# Altium PCB LM2596_DC-DC_PCB.PcbDoc
Units mm, origin at the board's own origin, x right, y up, seen from the top; angles counter-clockwise.
Board outline 42.5 x 28.75 mm, 2 copper layers (Top Layer, Bottom Layer); 7 components, 5 nets, 22 pads, 0 vias.
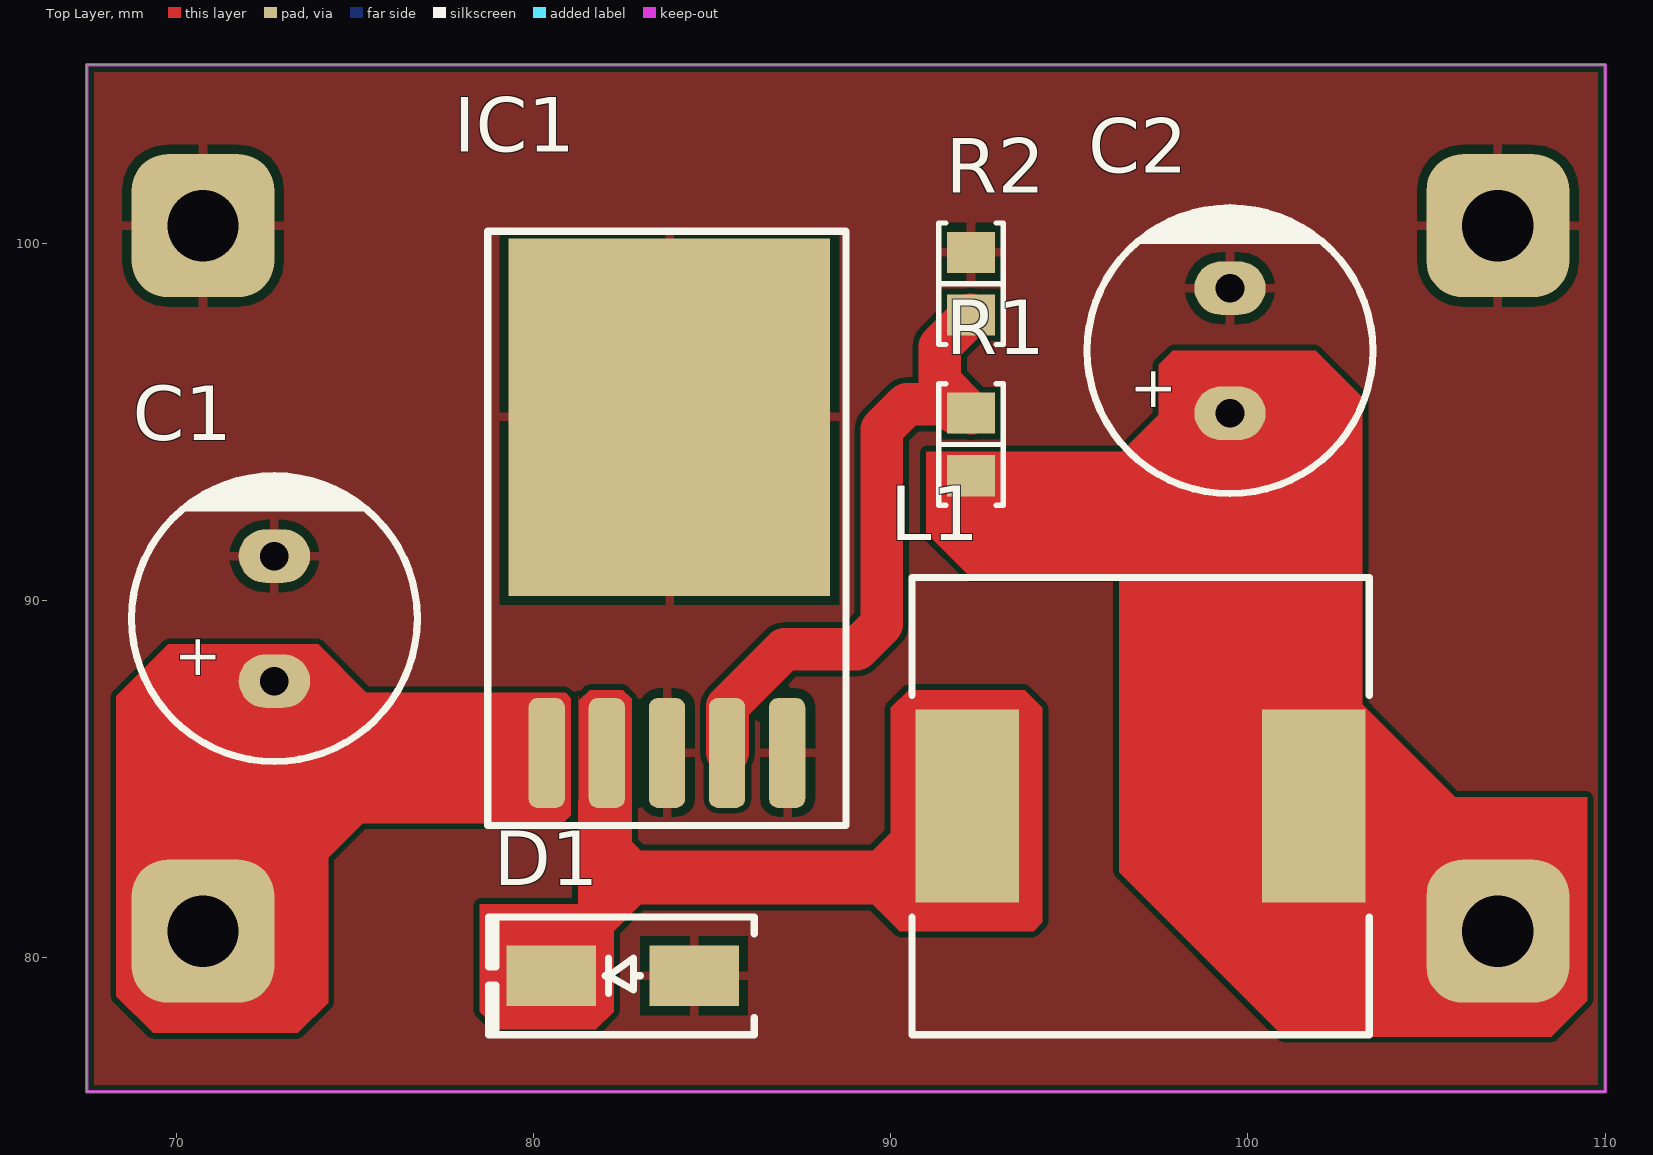
[diagram p0: Top Layer view]
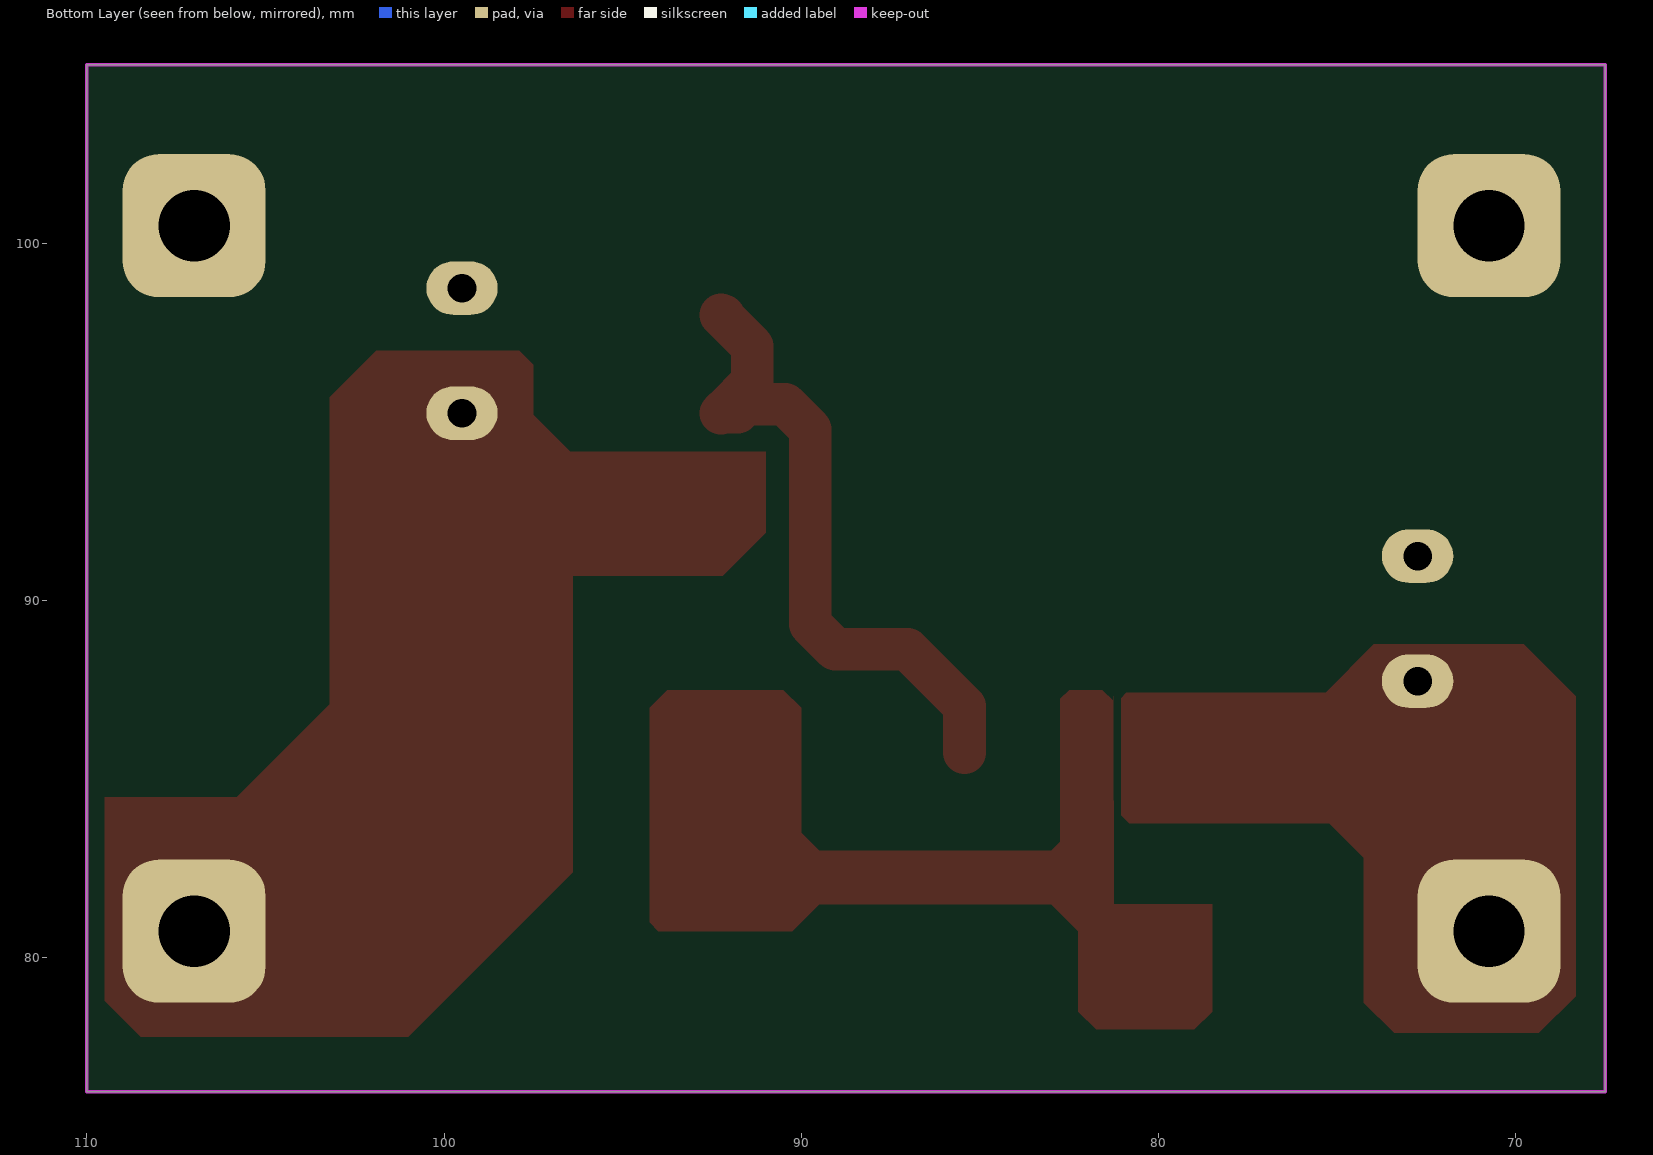
[diagram p1: Bottom Layer view, seen from below]
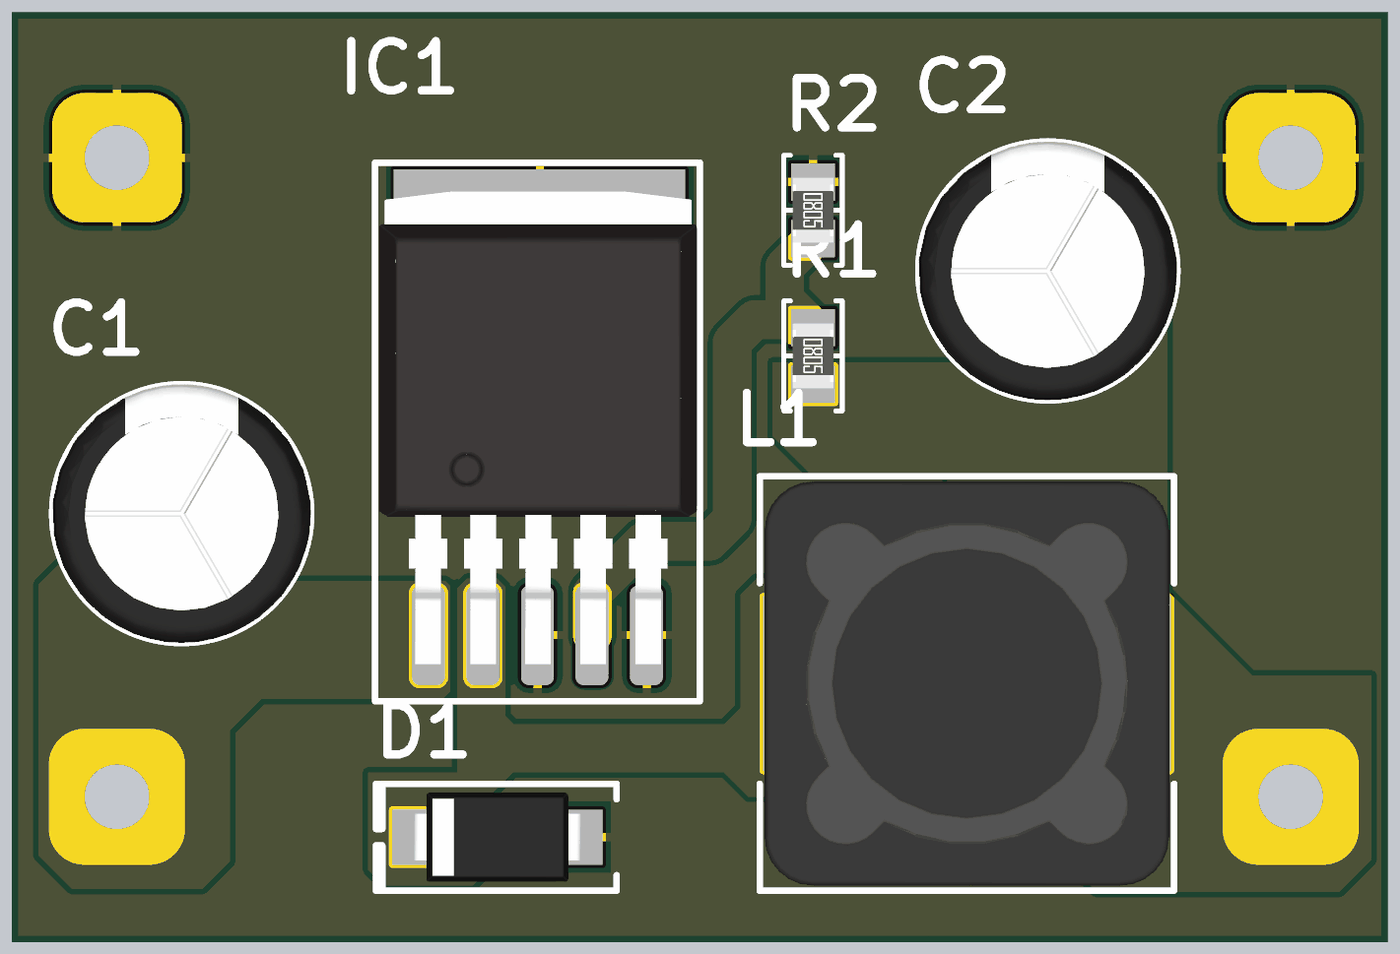
[diagram p2: 3D render of the assembled board from above, using the file's embedded part models]

## Layer stack, top to bottom
Top Solder: solder mask 0.0102, Solder Resist, Dk 3.5
Top Layer: signal copper 0.0356
Dielectric 1: dielectric 0.32, FR-4, Dk 4.8
Bottom Layer: signal copper 0.0356
Bottom Solder: solder mask 0.0102, Solder Resist, Dk 3.5

## Board outline
67.5,76.25 67.5,105 110,105 110,76.25

## Design rules (kind name [scope] priority, off if disabled: settings)
Clearance [All] p1: gap=0.152 ignorepadtopadclearanceinfootprint=FALSE
HoleSize [All] p1: absolutevalues=TRUE maxlimit=5 minlimit=0.025 maxpercent=80.000 minpercent=20.000
PolygonConnect [All] p1: thpad.connectstyle=Direct thpad.reliefconductorwidth=0.254 thpad.reliefentries=4 thpad.polygonreliefangle="90 Angle" thpad.airgapwidth=0.254 smdpad.connectstyle=Relief smdpad.reliefconductorwidth=0.5 smdpad.reliefentries=4 smdpad.polygonreliefangle="90 Angle" smdpad.airgapwidth=0.2 via.connectstyle=Direct via.reliefconductorwidth=0.254 via.reliefentries=4 via.polygonreliefangle="90 Angle" via.airgapwidth=0.254
RoutingVias [All] p1: holewidth=0.711 width=1.27 viastyle="Through Hole" minholewidth=0.711 minwidth=1.27 maxholewidth=0.711 maxwidth=1.27
SolderMaskExpansion [All] p1: expansion=0.102 istentingtop=FALSE
Width [All] p1: maxlimit=2 minlimit=0.152 preferedwidth=0.5
29 further rules are at their usual default settings.

## Components (designator, comment, footprint, x,y, rotation, side; value= is the part's Value field where it differs from the comment)
C1 "100 µF" "CAP AL TH D8 L3.5 H12.5" 72.75,89.5 r90 top
C2 "220 µF" "CAP AL TH D8 L3.5 H12.5" 99.5,97 r90 top
D1 "ACDBA560-HF" "DO214AC SMA" 82.5,79.5 r180 top
IC1 "LM2596" D2PAK 83.293,94.502 r0 top
L1 "33 µH" "BOURNS SRR1280" 97,84.25 r0 top
R1 "10 kOhms" "RES 0805_2012" 92.25,94.375 r270 top
R2 "47 kOhms" "RES 0805_2012" 92.25,98.875 r270 top

## Footprints (in the part's own frame and the unit in brackets; to place one, negate y for a bottom-side part, rotate by r counter-clockwise, add the part's x,y. Pads: shape width x height; smd on the part's side, far side on the other; paste and mask are expansions set on the pad)
"BOURNS SRR1280" [mm] "Precision Wire Wound Inductor, 2-Leads, Body 12.50x12.50mm, IPC Medium Density"
  rect 2.9x5.4 smd: 1(-4.85,0) 2(4.85,0)
  silkscreen extent -6.4,-6.4 6.4,6.4, body extent -6.25,-6.25 6.25,6.25, height 7.9
"CAP AL TH D8 L3.5 H12.5" [mm] "8MM Diameter, 3.5MM Lead Spacing Aluminium Capacitor"
  oval 1.5x2 hole 0.8: 1(-1.75,0) 2(1.75,0)
  silkscreen extent -4,-4 4,4, body extent -4,-4 4,4, height 11.5
D2PAK [mil]
  rrect50% 40x121.06 smd: 1(-115,-345) 2(-48.75,-345) 3(17.5,-345) 4(83.75,-345) 5(150,-345)
  rect 354.33x393.7 smd: 6(20,25)
  silkscreen extent -180,-425 215,230, body extent -175,-380 212,195, height 166
"DO214AC SMA" [mm] "Molded Diode, 2-Leads, Body 4.30x2.60mm, IPC Medium Density"
  rect 2.5x1.7 smd: 1(-2,0) 2(2,0)
  silkscreen extent -3.68,-1.65 3.75,1.65, body extent -2.6,-1.37 2.6,1.37, height 2.4
"RES 0805_2012" [mm] "Chip Resistor, 2-Leads, Body 2.00x1.25mm, IPC Medium Density"
  rect 1.15x1.35 smd: 1(-0.875,0) 2(0.875,0)
  silkscreen extent -1.7,-0.9 1.7,0.9, body extent -1,-0.62 1,0.63, height 0.6

## Part data
C1: library part ECA-1JM101, "CAP ALUM 100UF 20% 63V RADIAL", Device Package="Radial, Can", Lifetime @ Temp.="2000 Hrs @ 85°C", manufacturer="Panasonic Electronic Components", Operating Temperature="-40°C ~ 85°C", Ripple Current @ High Frequency="459 mA @ 10 kHz", Ripple Current @ Low Frequency="270 mA @ 120 Hz", Supplier Part Number 1=P5193-ND, Tolerance=±20%, Voltage - Rated="63 V", Applications="General Purpose", Capacitance="100 µF", componentlink1description=Datasheet, componentlink1url=//media.digikey.com/pdf/Data%20Sheets/Panasonic%20Electronic%20Components/ECA-xxM%20Series,TypeA.pdf, componentlink2description="DigiKey Link", componentlink2url=https://www.digikey.com/en/products/detail/panasonic-electronic-components/ECA-1JM101/245052, Height - Seated (Max)="0.492\" (12.50mm)", lastupdated="19.09.2022 13:55:06", Lead Spacing="0.138\" (3.50mm)", Lifecycle Status=Active, Minimum Order=1, Mounting Type="Through Hole", Package / Case="Radial, Can", packaging=Bulk, Part Number=ECA-1JM101, Part Status=Active, partid=7225, Polarization=Polar, price=0.13, series=M-A, Size / Dimension="0.315\" Dia (8.00mm)", Supplier 1=DigiKey
C2: library part ECA-1VM221, "CAP ALUM 220UF 20% 35V RADIAL", Device Package="Radial, Can", Lifetime @ Temp.="2000 Hrs @ 85°C", manufacturer="Panasonic Electronic Components", Operating Temperature="-40°C ~ 85°C", Ripple Current @ High Frequency="595 mA @ 10 kHz", Ripple Current @ Low Frequency="350 mA @ 120 Hz", Supplier Part Number 1=P5166-ND, Tolerance=±20%, Voltage - Rated="35 V", Applications="General Purpose", Capacitance="220 µF", componentlink1description=Datasheet, componentlink1url=//media.digikey.com/pdf/Data%20Sheets/Panasonic%20Electronic%20Components/ECA-xxM%20Series,TypeA.pdf, componentlink2description="DigiKey Link", componentlink2url=https://www.digikey.com/en/products/detail/panasonic-electronic-components/ECA-1VM221/245025, Height - Seated (Max)="0.492\" (12.50mm)", lastupdated="19.09.2022 13:55:05", Lead Spacing="0.138\" (3.50mm)", Lifecycle Status=Active, Minimum Order=1, Mounting Type="Through Hole", Package / Case="Radial, Can", packaging=Bulk, Part Number=ECA-1VM221, Part Status=Active, partid=7280, Polarization=Polar, price=0.10, series=M-A, Size / Dimension="0.315\" Dia (8.00mm)", Supplier 1=DigiKey
D1: "DIODE SCHOTTKY 60V 5A DO214AC", Capacitance @ Vr, F="250pF @ 4V, 1MHz", Current - Average Rectified (Io)="5A (DC)", Current - Reverse Leakage @ Vr="500 µA @ 60 V", manufacturer="Comchip Technology", Operating Temperature - Junction="-55°C ~ 125°C", Package / Case="DO-214AC, SMA", Supplier Device Package="DO-214AC (SMA)", Supplier Part Number 1=641-2078-1-ND, Voltage - DC Reverse (Vr) (Max)="60 V", Voltage - Forward (Vf) (Max) @ If="700 mV @ 5 A", componentlink1description=Datasheet, componentlink1url=http://www.comchiptech.com/admin/files/product/ACDBA560-HF%20RevA201382.pdf, componentlink2description="DigiKey Link", componentlink2url=https://www.digikey.com/en/products/detail/comchip-technology/ACDBA560-HF/7100903, Diode Type=Schottky, lastupdated="19.09.2022 13:46:18", Lifecycle Status=Active, Minimum Order=1, Mounting Type="Surface Mount", packaging=TapeAndReel, Part Number=ACDBA560-HF, Part Status=Active, partid=1832, price=0.15, series="Automotive, AEC-Q101", Speed="Fast Recovery =< 500ns, > 200mA (Io)", Supplier 1=DigiKey
L1: library part SRR1280-330M, "FIXED IND 33UH 3.5A 57 MOHM SMD", Current - Saturation=3.3A, Current Rating (Amps)="3.5 A", DC Resistance (DCR)="57mOhm Max", Device Package=Nonstandard, Frequency - Self Resonant=9.5MHz, manufacturer="Bourns Inc.", Operating Temperature="-40°C ~ 125°C", Q @ Freq="28 @ 2.52MHz", Supplier Part Number 1=SRR1280-330MCT-ND, Tolerance=±20%, Inductance Frequency - Test="100 kHz", componentlink1description=Datasheet, componentlink1url=https://www.bourns.com/docs/Product-Datasheets/SRR1280.pdf, componentlink2description="DigiKey Link", componentlink2url=https://www.digikey.com/en/products/detail/bourns-inc/SRR1280-330M/1969998, Height - Seated (Max)="0.315\" (8.00mm)", lastupdated="19.09.2022 13:52:26", Lifecycle Status=Active, Material - Core=Ferrite, Minimum Order=1, Mounting Type="Surface Mount", Package / Case=Nonstandard, packaging=TapeAndReel, Part Number=SRR1280-330M, Part Status=Active, partid=25, price=0.55, series=SRR1280, Shielding=Shielded, Size / Dimension="0.492\" L x 0.492\" W (12.50mm x 12.50mm)", Supplier 1=DigiKey, Type="Drum Core, Wirewound", Inductance="33 µH"
R1: library part RNCS0805BKE10K0, "RES 10K OHM 0.1% 1/10W 0805", Device Package="0805 (2012 Metric)", manufacturer="Stackpole Electronics Inc", Operating Temperature="-55°C ~ 155°C", Power (Watts)="0.1W, 1/10W", Ratings=AEC-Q200, Supplier Device Package=0805, Supplier Part Number 1=RNCS0805BKE10K0CT-ND, Temperature Coefficient=±25ppm/°C, Tolerance=±0.1%, componentlink1description=Datasheet, componentlink1url=https://www.seielect.com/catalog/sei-rncs_rnch.pdf, componentlink2description="DigiKey Link", componentlink2url=https://www.digikey.com/en/products/detail/stackpole-electronics-inc/RNCS0805BKE10K0/1800067, Composition="Thin Film", Features="Anti-Corrosive, Automotive AEC-Q200, Moisture Resistant", Height - Seated (Max)="0.026\" (0.65mm)", lastupdated="19.09.2022 13:36:59", Lifecycle Status=Active, Minimum Order=1, Number of Terminations=2, Package / Case="0805 (2012 Metric)", packaging=TapeAndReel, Part Number=RNCS0805BKE10K0, Part Status=Active, partid=27713, price=0.09, Resistance="10 kOhms", series=RNCS, Size / Dimension="0.079\" L x 0.049\" W (2.00mm x 1.25mm)", Supplier 1=DigiKey
R2: library part CRGP0805F47K, "RES 47K OHM 1% 1/3W 0805", Device Package="0805 (2012 Metric)", manufacturer="TE Connectivity Passive Product", Operating Temperature="-55°C ~ 155°C", Power (Watts)="0.333W, 1/3W", Supplier Device Package=0805, Supplier Part Number 1=A130497CT-ND, Temperature Coefficient=±100ppm/°C, Tolerance=±1%, componentlink1description=Datasheet, componentlink1url=https://www.te.com/commerce/DocumentDelivery/DDEController?Action=srchrtrv&DocNm=9-1773463-9&DocType=DS&DocLang=English, componentlink2description="DigiKey Link", componentlink2url=https://www.digikey.com/en/products/detail/te-connectivity-passive-product/CRGP0805F47K/8577099, Composition="Thick Film", Features="Pulse Withstanding", Height - Seated (Max)="0.026\" (0.65mm)", lastupdated="19.09.2022 13:36:56", Lifecycle Status=Active, Minimum Order=1, Number of Terminations=2, Package / Case="0805 (2012 Metric)", packaging=TapeAndReel, Part Number=CRGP0805F47K, Part Status=Active, partid=28741, price=0.02, Resistance="47 kOhms", series=CRGP, Size / Dimension="0.079\" L x 0.049\" W (2.00mm x 1.25mm)", Supplier 1=DigiKey

## Free pads (board coordinates)
  rrect50% 4x4 hole 2: GND(70.75,100.5) GND(107,100.5) VIN(70.75,80.75) VOUT(107,80.75)

## Nets (pads, with @x,y where several pads share a name; then routed paths per layer and width w, separated by ;. In a path a pad name is that pad's centre, name@x,y a point inside that pad or via, vN(x,y) a via of type N, cw(c..) or ccw(c..) an arc to the next point about the centre after c; other vN are vias at no path point)
+12: C2.1 L1.2 pad.VOUT R1.2
FeedBack: IC1.4 R1.1 R2.2 | length 18.4
  Top Layer w1.2: IC1.4@85.433,85.75 85.433,87.047 87.029,88.643 89.047,88.643 89.75,89.346 89.75,94.797 90.453,95.5 91.563,95.5 91.788,95.275 92.225,95.275 R1.1 ; R1.1@92.175,95.275 92.175,95.325 91.375,96.125 91.375,97.125 92.175,97.925 92.175,97.975 92.225,97.975 R2.2
GND: C1.2 C2.2 D1.1 IC1.3 IC1.5 IC1.6 pad.GND R2.1
NetD1_2: D1.2 IC1.2 L1.1
VCC: C1.1 IC1.1 pad.VIN

## Polygon pours and split planes (outlines as drawn)
GND on Top Layer "GND_L01_P004" (solid, pour order 4): 67.5,105 110,105 110,76.25 67.5,76.25

## Keep-outs
Keep-Out Layer:
  lines w0.1: 67.5,76.25 67.75,76.25 110,76.25 110,105 67.5,105 67.5,76.25

## Other copper
Top Layer:
  region net VCC: 81.05,87.275 80.9,87.425 75.325,87.425 73.975,88.775 69.775,88.775 68.325,87.325 68.325,78.925 69.35,77.9 73.4,77.9 74.25,78.75 74.25,82.8 75.225,83.775 80.825,83.775 81.05,84
  region net NetD1_2: 81.264,87.195 81.57,87.5 82.5,87.5 82.75,87.25 82.75,83.25 83,83 89.5,83 90,83.5 90,87 90.5,87.5 93.75,87.5 94.25,87 94.25,81 94,80.75 90.25,80.75 89.5,81.5 83,81.5 82.25,80.75 82.25,78.5 81.75,78 79,78 78.5,78.5 78.5,81.5 81.25,81.5 81.264,87.325
  region net +12: 91,94.175 96.475,94.175 97.5,95.2 97.5,96.6 97.9,97 101.9,97 103.2,95.7 103.2,87.1 105.8,84.5 109.5,84.5 109.5,78.8 108.5,77.8 101,77.8 96.4,82.4 96.4,90.7 92.2,90.7 91,91.9 91,94.1 91,91.9

## Text inside footprints (layer, text, board x,y; h text height)
C1: Top Overlay "+" at 71.5,87.75 h2 r90
C2: Top Overlay "+" at 98.25,95.25 h2 r90